# EAGLE board esp_test (EAGLE 7.7.0)

Size 30.99 x 57.4 mm. Coordinates in mm from the lower left corner, seen from the top.
Outline: 0,57.4 30.99,57.4 30.99,0 0,0 0,57.4
Copper layers (1*16): Top 0.035mm / dielectric 1.6mm / Bottom 0.035mm
Design rules "Elecrow_2-layer_PCB_eagle_rule": minimum track width 6mil, minimum drill 12mil, track to track 6mil, track to pad 6mil, pad to pad 6mil, via to via 8mil, smd to smd 0mil, copper to edge 20mil, drill to drill 10mil, minimum pad ring 6mil, minimum via ring 6mil, stop-mask expansion 0mil, vias tented up to drill 100mil, thermal gap 10mil

## Footprints (pad centres in the part's own frame; a part is rotated, then mirrored left to right if it is on the bottom)
TP20SQ = smd 2 x 2: TP 0,0
C1210 = smd 1.6 x 2.7: 1 -1.4,0; 2 1.4,0
DO35-7 = drill 0.813 long: A 3.81,0; C -3.81,0
ESP12E_DEVKIT = drill 0.8: 3V3@0 -11.43,-7.62; 3V3@1 11.43,5.08; 3V3@2 11.43,-17.78; 3V3@3 -13.9,-7.62; 3V3@4 13.9,5.08; 3V3@5 13.9,-17.78; AD0 -11.43,17.78; AD1 -13.9,17.78; CLK -11.43,-2.54; CLK1 -13.9,-2.54; CMD -11.43,2.54; CMD1 -13.9,2.54; D0 11.43,17.78; D1 11.43,15.24; D01 13.9,17.78; D2 11.43,12.7; D3 11.43,10.16; D4 11.43,7.62; D5 11.43,0; D6 11.43,-2.54; D7 11.43,-5.08; D8 11.43,-7.62; D11 13.9,15.24; D21 13.9,12.7; D31 13.9,10.16; D41 13.9,7.62; D51 13.9,0; D61 13.9,-2.54; D71 13.9,-5.08; D81 13.9,-7.62; EN -11.43,-10.16; EN1 -13.9,-10.16; GND@0 -11.43,-5.08; GND@1 -11.43,-15.24; GND@2 11.43,2.54; GND@3 11.43,-15.24; GND@4 -13.9,-15.24; GND@5 -13.9,-5.08; GND@6 13.9,2.54; GND@7 13.9,-15.24; RST -11.43,-12.7; RST1 -13.9,-12.7; RSV@0 -11.43,15.24; RSV@1 -11.43,12.7; RSV@01 -13.9,15.24; RSV@11 -13.9,12.7; RX 11.43,-10.16; RX1 13.9,-10.16; SD0 -11.43,0; SD1 -11.43,5.08; SD01 -13.9,0; SD2 -11.43,7.62; SD3 -11.43,10.16; SD12 -13.9,5.08; SD22 -13.9,7.62; SD32 -13.9,10.16; TX 11.43,-12.7; TX1 13.9,-12.7; VIN -11.43,-17.78; VIN1 -13.9,-17.78
1X02 = drill 1.016 long: 1 -1.27,0; 2 1.27,0
1X04 = drill 1.016 long: 1 -3.81,0; 2 -1.27,0; 3 1.27,0; 4 3.81,0
JP2 = drill 0.914 long: 1 -2.54,0; 2 0,0; 3 2.54,0
LED3MM = drill 0.813 octagon: A -1.27,0; K 1.27,0
R0805 = smd 1.3 x 1.5: 1 -0.95,0; 2 0.95,0
TO92-CBE = drill 0.813 long: B 0,0; C -2.54,0; E 2.54,0

## Placement (x,y rotation side)
5VBRD  TPSQTP20SQ  [TP20SQ]  29.21,5.84 0 top
AGND  TPSQTP20SQ  [TP20SQ]  29.21,2.03 0 top
C3  [C1210]  -13.97,-260.35 0 top  (outside the outline)
D4  1N4148DO35-7  [DO35-7]  23.88,55.37 0 bottom
D5  1N4148DO35-7  [DO35-7]  6.6,55.12 0 bottom
ESP1  ESP12E_DEVKIT  [ESP12E_DEVKIT]  15.49,28.7 0 top
JP1  [1X02]  20.32,44.96 0 top
JP2  [1X02]  11.43,44.96 0 top
JP3  [1X02]  20.32,34.29 0 top
JP4  [1X02]  11.43,34.29 0 top
JP5  [1X02]  14.73,54.1 180 top
JP6  [1X04]  15.24,3.3 0 top
JP7  [JP2]  5.08,2.54 180 top
LED1  [LED3MM]  0,-252.73 0 top  (outside the outline)
R10  2k  [R0805]  -6.35,-262.89 0 top  (outside the outline)
R11  [R0805]  12.7,7.62 0 top
T3  [TO92-CBE]  -6.35,-273.05 0 top  (outside the outline)

## Library data of the parts
5VBRD AGND = testpad
C3 R10 R11 = rcl
D4 D5 = diode
ESP1 = ESP12E_DEVKIT
JP1-JP6 = pinhead
JP7 = jumper
LED1 = led
T3 = transistor

## Nets
+5V: 5VBRD.TP ESP1.VIN ESP1.VIN1 JP3.1 JP3.2 JP7.1
+9V: D4.C JP1.1 JP1.2
AGND: AGND.TP D5.A ESP1.GND@0 ESP1.GND@1 ESP1.GND@2 ESP1.GND@3 ESP1.GND@4 ESP1.GND@5 ESP1.GND@6 ESP1.GND@7 JP2.1 JP2.2 JP4.1 JP4.2 JP6.4
DHT_BUS: ESP1.D4 ESP1.D41 JP6.2 R11.2
DHT_PWR: JP6.1 JP7.2 R11.1
ESP3V3: ESP1.3V3@2 JP7.3
N$33: LED1.A R10.2
V+: D4.A JP5.1
V-: D5.C JP5.2

## Tracks (layer width: path | path; a pad name or v marks a point on that pad's centre or on a via)
+5V  (5 unrouted)
+9V  (2 unrouted)
AGND  (14 unrouted)
DHT_BUS  (3 unrouted)
DHT_PWR  (2 unrouted)
ESP3V3  (1 unrouted)
N$33  (1 unrouted)
V+  (1 unrouted)
V-  (1 unrouted)